# Altium PCB otis_v4.PcbDoc
Units mil, origin at the board's own origin, x right, y up, seen from the top; angles counter-clockwise.
Board outline 1960 x 915 mil, 2 copper layers (Top Layer, Bottom Layer); 14 components, 28 nets, 92 pads, 14 vias.
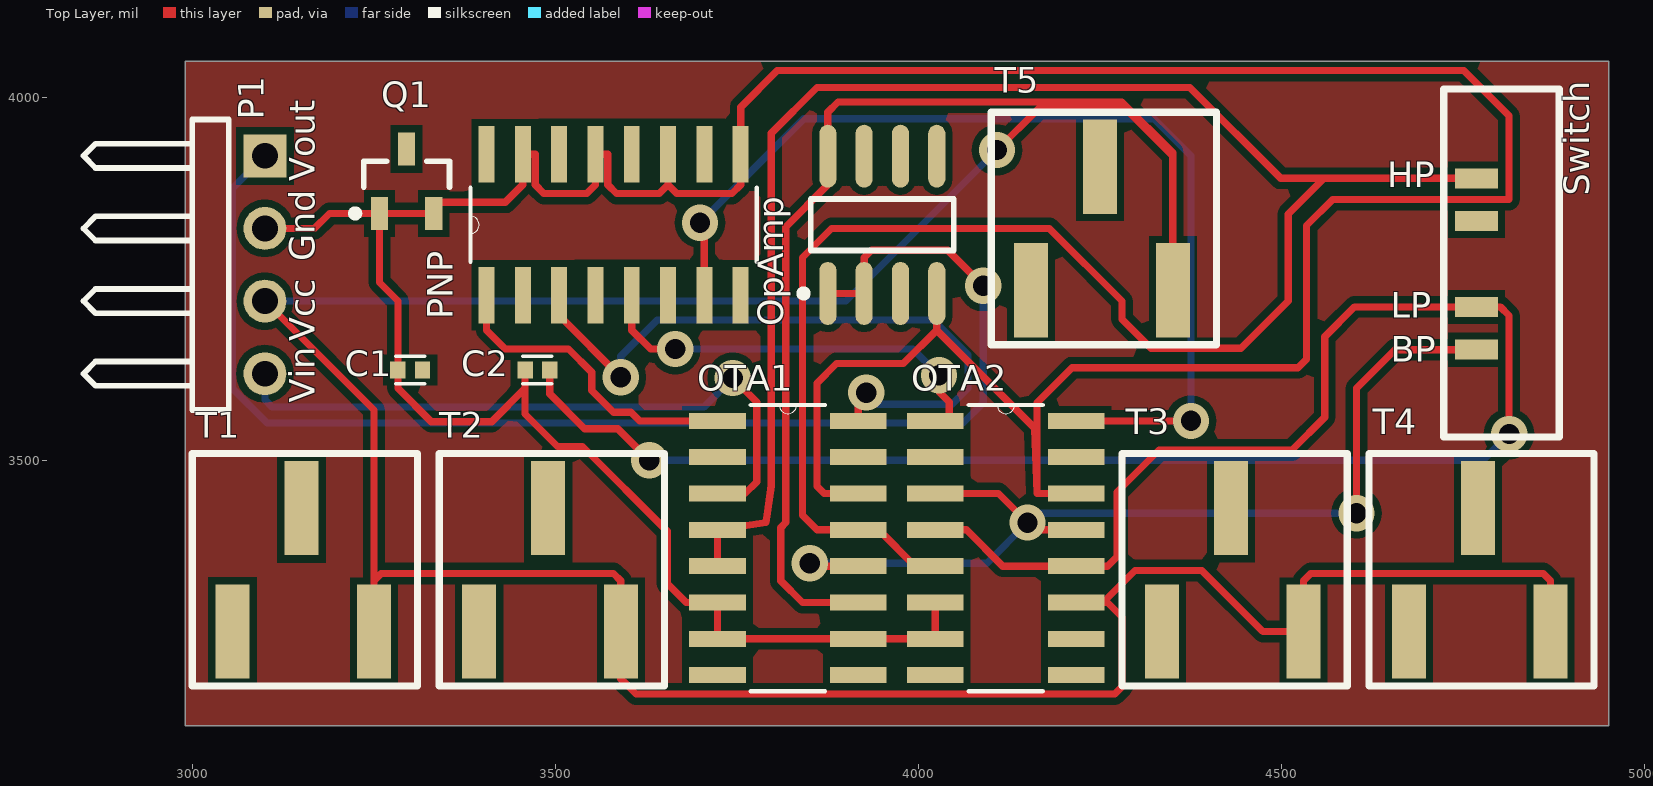
[diagram p0: Top Layer view]
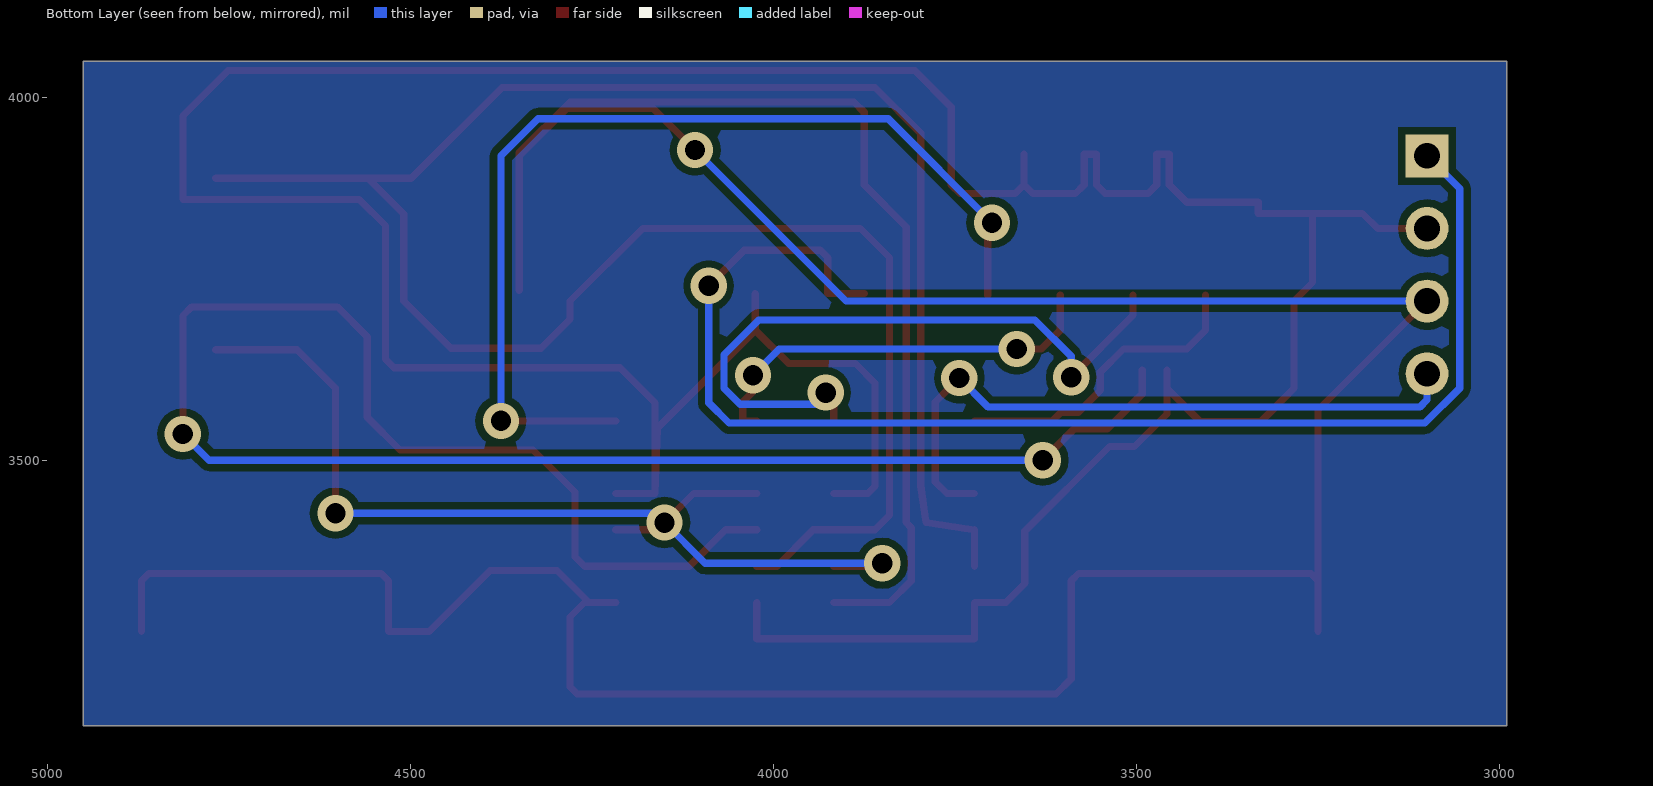
[diagram p1: Bottom Layer view, seen from below]

## Layer stack, top to bottom
Top Solder: solder mask 0.4, Solder Resist, Dk 3.5
Top Layer: signal copper 1.4
Dielectric1: dielectric 12.6, FR-4, Dk 4.8
Bottom Layer: signal copper 1.4
Bottom Solder: solder mask 0.4, Solder Resist, Dk 3.5

## Board outline
2995,4050 4950,4050 4950,3135 2990,3135 2990,4050

## Design rules (kind name [scope] priority, off if disabled: settings)
Clearance [All] p1: gap=10
FabricationTestPointUsage TestPointUsage [All] p1: valid=0 allowmultiple=FALSE
FabricationTestpoint Testpoint [All] p1: side=3 testpointundercomponent=TRUE minsize=40 maxsize=100 preferedsize=60 minholesize=0 maxholesize=40 preferedholesize=32 testpointgrid=1 allowsidetop=TRUE allowsidebottom=TRUE usegrid=TRUE gridtolerance=0.01
PolygonConnect [All] p1: connectstyle=Relief reliefconductorwidth=10 reliefentries=4 polygonreliefangle="90 Angle" airgapwidth=10
RoutingVias [All] p1: holewidth=28 width=50 viastyle="Through Hole" minholewidth=28 minwidth=50 maxholewidth=28 maxwidth=50
SolderMaskExpansion [All] p1: expansion=4
UnpouredPolygon [All] p1: allowunpoured=FALSE
Width [All] p1: maxlimit=15 minlimit=10 preferedwidth=10 minimp=50.000000 maximp=50.000000 favimp=50.000000
27 further rules are at their usual default settings.

## Components (designator, comment, footprint, x,y, rotation, side; value= is the part's Value field where it differs from the comment)
C1 "100pF" _C*CAPC1005X55N_CC0402C100K5GACAUTO_CPrimary_C 3300,3625 r0 top
C2 "100pF" _C*CAPC1005X55N_CC0402C100K5GACAUTO_CPrimary_C 3475,3625 r0 top
OpAmp "LF153D" SO8_N 3950,3825 r90 top
OTA1 "" LM13700LM13700MLM13700LM13700MLM13700PrimaryLM13700 3820,3380 r0 top
OTA2 "" LM13700LM13700MLM13700LM13700MLM13700PrimaryLM13700 4120,3380 r0 top
P1 "Header 4H" HDR1X4H 3100,3920 r270 top
PNP "MMPQ3906" LM13700LM13700MLM13700LM13700MLM13700PrimaryLM13700 3580,3825 r90 top
Q1 "PNP" SOT-23B_N 3295,3885 r90 top
T1 "" PCBComponent_1#1 17520,31340 r0 top
T2 "" PCBComponent_1#1 17860,31340 r0 top
T3 "" PCBComponent_1#1 18800,31340 r0 top
T4 "" PCBComponent_1#1 19140,31340 r0 top
T5 "" PCBComponent_1#1 18620,31810 r0 top
? "Switch" PCBComponent_1#2 -28240,30600 r90 top

## Footprints (in the part's own frame and the unit in brackets; to place one, negate y for a bottom-side part, rotate by r counter-clockwise, add the part's x,y. Pads: shape width x height; smd on the part's side, far side on the other; paste and mask are expansions set on the pad)
_C*CAPC1005X55N_CC0402C100K5GACAUTO_CPrimary_C [mm]
  rect 0.54x0.6 smd: 1(-0.43,0) 2(0.43,0)
  silkscreen extent -0.5,-0.48 0.5,0.48
HDR1X4H [mm] "Connector; Header; 4 Position; Right Angle"
  rect 1.5x1.5 hole 0.9: 1(0,0)
  round 1.5 hole 0.9: 2(2.54,0) 3(5.08,0) 4(7.62,0)
  silkscreen extent -1.27,-6.35 8.89,-1.27
LM13700LM13700MLM13700LM13700MLM13700PrimaryLM13700 [mil]
  rect 78x22 smd: 1(-97,175) 2(-97,125) 3(-97,75) 4(-97,25) 5(-97,-25) 6(-97,-75) 7(-97,-125) 8(-97,-175) 9(97,-175) 10(97,-125) 11(97,-75) 12(97,-25) 13(97,25) 14(97,75) 15(97,125) 16(97,175)
  silkscreen extent -51,-197 51,197
PCBComponent_1#1 [mm]
  rect 1.19x3.3 smd: 1(-364.998,-708.787) 2(-367.411,-713.105) 3(-362.458,-713.105)
  silkscreen extent -368.81,-715.01 -360.93,-706.88
PCBComponent_1#2 [mm]
  rect 0.7x1.5 smd: 1(-684.454,-838.403) 2(-682.955,-838.403) 3(-679.958,-838.403) 4(-678.459,-838.403)
  round 0.9 on Top Solder: 8(-683.971,-840.054) 9(-678.942,-840.054)
  rect 1x0.8 on Top Paste: MP1(-686.587,-839.089) MP2(-686.587,-840.537) MP3(-676.25,-839.089) MP4(-676.25,-840.537)
  silkscreen extent -687.5,-841.3 -675.34,-837.26
SO8_N [mm] "SOIC, 8-Leads, Body 4.9x3.9mm, Pitch 1.27mm, IPC Medium Density"
  oval 2.2x0.6 smd: 1(-2.4,1.905) 2(-2.4,0.635) 3(-2.4,-0.635) 4(-2.4,-1.905) 5(2.4,-1.905) 6(2.4,-0.635) 7(2.4,0.635) 8(2.4,1.905)
  silkscreen extent -2.52,-2.5 0.9,2.88, body extent -1.95,-2.45 1.95,2.45, height 1.75
SOT-23B_N [mm] "SOT23, 3-Leads, Body 2.9x1.3mm, Pitch 0.95mm, Lead Span 2.4mm, IPC Medium Density"
  rect 1.15x0.6 smd: 1(-1.125,0.95) 2(-1.125,-0.95) 3(1.125,0)
  silkscreen extent -1.25,-1.5 0.7,1.92, body extent -0.7,-1.5 0.7,1.5, height 1.14

## Part data
C1 C2: library part C0402C100K5GACAUTO, "CAPACITOR CERAMIC 10 PF 10% TOL 50V C0G 0402"
OpAmp: "Wide-Bandwidth Dual J-FET Operational Amplifier"
OTA1 OTA2 T1 T2 T3 T4 T5 ?: library part Component_1
P1: "Header, 4-Pin, Right Angle"
PNP: library part LM13700M, "Dual Operational Transconductance Amplifier with Linearizing Diodes and Buffers 16-SOIC 0 to 70"
Q1: "PNP Bipolar Transistor"

## Via types
v1: diameter 50, hole 28, Top Layer to Bottom Layer, 14 vias

## Nets (pads, with @x,y where several pads share a name; then routed paths per layer and width w, separated by ;. In a path a pad name is that pad's centre, name@x,y a point inside that pad or via, vN(x,y) a via of type N, cw(c..) or ccw(c..) an arc to the next point about the centre after c; other vN are vias at no path point)
BP: ?.1 OTA1.12 OTA2.3 OTA2.13 | length 1423.9
  Top Layer w10: v1(3850,3359) 3854,3355 OTA1.12 ; OTA2.3 4110,3455 v1(4150,3415) 4160,3405 OTA2.13 ; v1(4603,3428) 4603,3600 4656,3653 ?.1
  Bottom Layer w10: v1(3850,3359) 4094,3359 v1(4150,3415) 4163,3428 v1(4603,3428)
GND: C1.1 C2.1 OpAmp.4 OTA1.6 OTA1.7 OTA1.10 OTA1.14 OTA2.6 OTA2.7 OTA2.14 P1.2 PNP.9 PNP.11 PNP.13 PNP.15 Q1.1 Q1.2 | length 5377.5
  Top Layer w10: P1.2 3168,3820 3188.71,3840.71 Q1.1 ; C2.1 3458.07,3600 ; PNP.11 3655,3880 ; OTA1.14 3870,3455 3860,3465 3860,3607 3887,3634 3979,3634 4025,3680 ; OTA2.6 OTA2.7 OTA1.10 OTA1.7 OTA1.6 3680,3305 3654,3331 3654,3403 3537.22,3519.78 3502.87,3519.78 3458.07,3564.57 3458.07,3600 ; OpAmp.4 4025,3680 ; OTA2.14 4163,3455 ; Q1.1 3257.6,3745.47 3283.07,3720 C1.1 3283.07,3600 3329.07,3554 3412.07,3554 3458.07,3600 ; Q1.1 Q1.2 3332.4,3856 3431,3856 3455,3880 PNP.15 3472,3922 3472,3880 3484,3868 3543,3868 3555,3880 PNP.13 3572,3922 3572,3880 3584,3868 3643,3868 3655,3880 ; 3655,3880 3667,3868 3743,3868 3755,3880 PNP.9 3755,3987 3805.5,4037.5 4750.5,4037.5 4813,3975 4813,3860 4570,3860 4534,3824 4534,3640 4522.26,3628.26 4211.26,3628.26 4163,3580 4163,3455 ; 4025,3680 4160,3545 4163,3455
HP: ?.4 OTA1.4 OTA1.5 OTA1.13 OTA2.5 | length 3255
  Top Layer w10: OTA1.5 OTA1.4 3790,3415 3797,3466 3797,3951.11 3860,4014.11 4373.39,4014.11 4498.5,3889 4558,3889 ; OTA2.5 3995,3355 3945,3405 OTA1.13 3860,3405 3840,3425 3840,3780 3880,3820 4180,3820 4280,3720 4280,3695 4320,3655 4444,3655 4509,3720 4509,3840 4558,3889 ; ?.4 4558,3889
LP: ?.2 C2.2 OTA2.4 OTA2.12 | length 2650.2
  Top Layer w10: C2.2 3491.93,3592.27 3540,3544.2 3585.8,3544.2 v1(3629,3501) ; OTA2.4 4066,3405 4116,3355 OTA2.12 4260,3355 4273,3368 4273,3457 4331,3515 4514,3515 4559,3560 4559,3671 4600,3712 ?.2 4801,3712 4813,3700 v1(4813,3537)
  Bottom Layer w10: v1(3629,3501) 4777,3501 v1(4813,3537)
Net_3: ?.3
NetC1_2: C1.2
NetOpAmp_1: OpAmp.1 OpAmp.2 P1.1 | length 1853
  Top Layer w10: OpAmp.1 OpAmp.2 3925,3780 3935,3790 4040,3790 v1(4089,3741)
  Bottom Layer w10: P1.1 3055,3875 3055,3600 3103,3552 4061,3552 4089,3580 v1(4089,3741)
NetOpAmp_3: OpAmp.3
NetOTA1: 
NetOTA1_1: OTA1.1 PNP.1 | length 432.5
  Top Layer w10: PNP.1 3405,3680 3431,3654 3518.05,3654 3550,3622.05 3550,3596.91 3580,3566.91 3604,3566.91 3615.91,3555 OTA1.1
NetOTA1_16: OTA1.16 PNP.3 | length 943.4
  Top Layer w10: PNP.3 3505,3700 v1(3590,3615) ; OTA1.16 3917,3583 v1(3928,3594)
  Bottom Layer w10: v1(3590,3615) 3590,3644 3640,3694 4020,3694 4068,3646 4068,3600 4046,3578 3940,3578 3928,3590 v1(3928,3594)
NetOTA2: 
NetOTA2_1: OTA2.1 PNP.5 | length 584.5
  Top Layer w10: PNP.5 3605,3680 3631,3654 v1(3665,3654) ; OTA2.1 4042,3555 4042,3581 4028,3595 v1(4028,3618)
  Bottom Layer w10: v1(3665,3654) 3992,3654 v1(4028,3618)
NetOTA2_16: OTA2.16 PNP.7 | length 1381.8
  Top Layer w10: v1(3699,3828) 3705,3822 PNP.7 ; OTA2.16 v1(4375,3555)
  Bottom Layer w10: v1(3699,3828) 3842,3971 4324,3971 4375,3920 v1(4375,3555)
NetOTA3: 
NetOTA4: 
NetPNP_10: PNP.10
NetPNP_12: PNP.12
NetPNP_14: PNP.14
NetPNP_16: PNP.16
NetQ1_1: T4.1
NetQ1_3: Q1.3
NetQ2_3: T1.1
NetQ3_3: T2.1
NetQ4_3: T3.1
NetQ5_3: T5.1
VCC: OpAmp.8 OTA1.11 OTA2.11 P1.3 T1.3 T2.3 T3.3 T4.3 T5.3 | length 5564.8
  Top Layer w10: P1.3 3250,3570 3250,3335 ; T1.3 3250,3335 ; OTA1.11 3840,3305 3810,3335 3810,3408 3817,3415 3817,3822 3875,3880 OpAmp.8 3875,3980 3889.11,3994.11 4280,3994.11 4350,3924.11 4350,3920 ; v1(4108,3928) 4165,3985 4285,3985 4350,3920 ; OTA2.11 OTA2.11@4254,3305 ; T5.3 4350,3920 ; T4.3 4870,3335 4860,3345 4540,3345 4530,3335 T3.3 4474,3265 4390,3349 4298,3349 OTA2.11@4254,3305 ; 3250,3335 3260,3345 3580,3345 3590,3335 T2.3 3590,3200 3611,3179 4270,3179 4280,3189 4280,3285 4260,3305 OTA2.11@4254,3305
  Bottom Layer w10: P1.3 3900,3720 v1(4108,3928)
VIN: OTA1.3 P1.4 | length 918
  Top Layer w10: OTA1.3 3761,3455 3777,3471 3777,3581 v1(3744,3614)
  Bottom Layer w10: P1.4 3100,3584 3110,3574 3704,3574 v1(3744,3614)
pads on no net: ?.8 ?.9 ?.MP1 ?.MP2 ?.MP3 ?.MP4 OpAmp.5 OpAmp.6 OpAmp.7 OTA1.2 OTA1.8 OTA1.9 OTA1.15 OTA2.2 OTA2.8 OTA2.9 OTA2.10 OTA2.15 PNP.2 PNP.4 PNP.6 PNP.8 T1.2 T2.2 T3.2 T4.2 T5.2

## Polygon pours and split planes (outlines as drawn)
no net on Top Layer "gnd" (solid, pour order 1000): 2990,4050 4950,4050 4950,3135 2990,3135
no net on Bottom Layer "gnd" (solid, pour order 1001): 2990,4050 4950,4050 4950,3135 2990,3135

## Silkscreen, mask and mechanical layers (free items; w line width, h text height)
Top Overlay:
  text "Vout" at 3180,3885 h60 r90
  text "HP" at 4645,3865 h60
  text "Switch" at 4935,3865 h60 r90
  text "Gnd" at 3180,3775 h60 r90
  text "LP" at 4650,3685 h60
  text "Vcc" at 3180,3665 h60 r90
  text "BP" at 4650,3625 h60
  text "Vin" at 3180,3580 h60 r90